# EAGLE board SparkFun_BME280_Breakout (EAGLE 7.1.0)
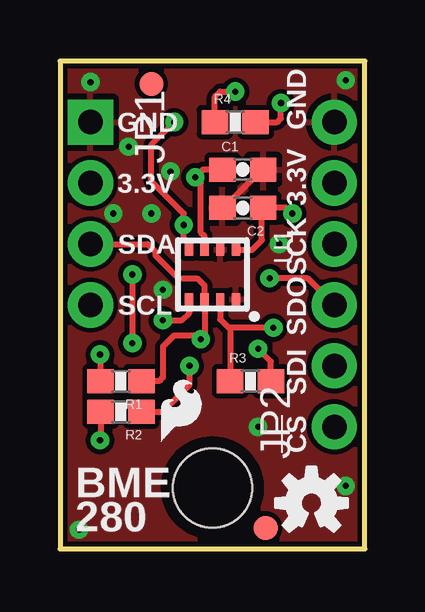
[diagram p0: board, top side]
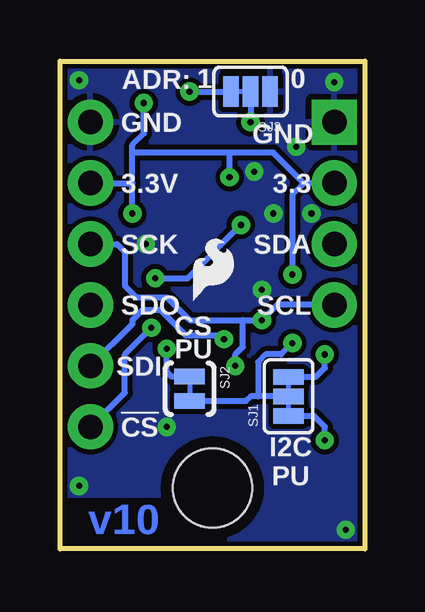
[diagram p1: board, bottom side, seen from below]

Size 12.7 x 20.32 mm. Coordinates in mm from the lower left corner, seen from the top.
Outline: 12.7,20.32 0,20.32 0,0 12.7,0 12.7,20.32
Copper layers (1*16): Top 0.035mm / dielectric 1.5mm / Bottom 0.035mm
Design rules "SparkFun-2-layer": minimum track width 7mil, minimum drill 15mil, track to track 8mil, track to pad 8mil, pad to pad 8mil, via to via 8mil, smd to smd 8mil, copper to edge 8mil, drill to drill 8mil, minimum pad ring 12mil, minimum via ring 10mil, stop-mask expansion 4mil, vias tented up to drill 20mil, thermal gap 10mil

## Footprints (pad centres in the part's own frame; a part is rotated, then mirrored left to right if it is on the bottom)
0603-CAP = smd 1.1 x 1: 1 -0.85,0; 2 0.85,0
FIDUCIAL-1X2 = smd 1 x 1: 1 0,0
1X04_NO_SILK = drill 1.016 pad 1.88 square: 1 0,0 | drill 1.016 pad 1.88: 2 2.54,0; 3 5.08,0; 4 7.62,0
1X06_NO_SILK = drill 1.016 pad 1.88: 1 0,0; 2 2.54,0; 3 5.08,0; 4 7.62,0; 5 10.16,0; 6 12.7,0
0603-RES = smd 1.1 x 1: 1 -0.85,0; 2 0.85,0
PAD-JUMPER-3-3OF3_NC_BY_TRACE_YES_SILK_FULL_BOX = smd 0.635 x 1.27: 1 -0.813,0; 2 0,0; 3 0.813,0
PAD-JUMPER-2-NC_BY_TRACE_YES_SILK = smd 0.635 x 1.27: 1 -0.508,0; 2 0.508,0
PAD-JUMPER-3-2OF3_NC_BY_TRACE_YES_SILK_FULL_BOX = smd 0.635 x 1.27: 1 -0.813,0; 2 0,0; 3 0.813,0
STAND-OFF = hole 3.302: 0,0
BME280_LGA = smd 0.5 x 0.35: P$1 1.025,0.975; P$2 1.025,0.325; P$3 1.025,-0.325; P$4 1.025,-0.975; P$5 -1.025,-0.975; P$6 -1.025,-0.325; P$7 -1.025,0.325; P$8 -1.025,0.975

## Placement (x,y rotation side)
C1  0.1uF  [0603-CAP]  7.62,15.8 0 top
C2  0.1uF  [0603-CAP]  7.62,14.21 180 top
FID1  FIDUCIAL1X2  [FIDUCIAL-1X2]  3.81,19.37 0 top
FID2  FIDUCIAL1X2  [FIDUCIAL-1X2]  8.57,0.87 0 top
FRAME1  FRAME-LETTER  [CREATIVE_COMMONS]  -26.67,-22.86 0 top  (outside the outline)
JP1  [1X04_NO_SILK]  1.27,17.78 270 top
JP2  [1X06_NO_SILK]  11.43,5.08 90 top
LOGO1  SFE_LOGO_FLAME.1_INCH  [SFE_LOGO_FLAME_.1]  7.46,10 0 bottom
LOGO2  SFE_LOGO_FLAME.1_INCH  [SFE_LOGO_FLAME_.1]  3.89,4.13 0 top
LOGO3  OSHW-LOGOS  [OSHW-LOGO-S]  10.48,1.91 0 top
R1  4.7K  [0603-RES]  2.54,6.99 180 top
R2  4.7K  [0603-RES]  2.54,5.71 180 top
R3  4.7K  [0603-RES]  7.94,6.99 0 top
R4  4.7K  [0603-RES]  7.3,17.78 0 top
SJ1  EN I2C PULL  [PAD-JUMPER-3-3OF3_NC_BY_TRACE_YES_SILK_FULL_BOX]  3.17,6.35 90 bottom
SJ2  EN I2C MODE  [PAD-JUMPER-2-NC_BY_TRACE_YES_SILK]  7.3,6.67 270 bottom
SJ3  EN ADR PULLUP  [PAD-JUMPER-3-2OF3_NC_BY_TRACE_YES_SILK_FULL_BOX]  4.76,19.05 180 bottom
STANDOFF4  STAND-OFF  [STAND-OFF]  6.35,2.54 0 top
U1  BME280  [BME280_LGA]  6.35,11.43 270 top

## Library data of the parts
C1 C2 = SparkFun-Capacitors; PROD_ID: CAP-08604
FID1 FID2 FRAME1 LOGO1-LOGO3 = SparkFun-Aesthetics
JP1 = SparkFun-Connectors
JP2 = SparkFun-Connectors; PROD_ID: CONN-08437
R1-R4 = SparkFun-Resistors; PROD_ID: RES-07857
SJ1-SJ3 = SparkFun-Passives
STANDOFF4 = SparkFun-Electromechanical
U1 = BME280ComponentLibrary; PROD_ID: IC-13090

## Nets
3.3V: C1.1 C2.1 JP1.2 JP2.5 R4.2 SJ1.2 SJ2.2 U1.P$6 U1.P$8
!CS: JP2.1 R3.1 U1.P$2
GND: C1.2 C2.2 JP1.1 JP2.6 SJ3.1 U1.P$1 U1.P$7
N$1: R1.2 SJ1.3
N$2: R2.2 SJ1.1
N$3: R3.2 SJ2.1
N$4: R4.1 SJ3.3
SCK/SCL: JP1.4 JP2.4 R2.1 U1.P$4
SDI/SDA: JP1.3 JP2.2 R1.1 U1.P$3
SDO/ADR: JP2.3 SJ3.2 U1.P$5

## Tracks (layer width: path | path; a pad name or v marks a point on that pad's centre or on a via)
3.3V  (via drill 0.25)
  Top 0.254: U1.P$6 6.03,13.03 5.87,13.18 5.87,15.24 v5.64,15.48 5.95,15.8 C1.1 | U1.P$8 8.01,12.46 8.41,12.86 8.41,14.15 C2.1 9.45,14.21 v9.68,13.97 | v3.02,11.43 v3.02,8.57 | R4.2 9.05,17.78 9.21,17.94 v9.21,18.57
  Bottom 0.254: JP1.2 2.54,15.24 | 2.54,15.24 3.81,16.51 5.64,16.51 | 5.64,16.51 9.68,16.51 | v9.68,13.97 9.68,15.24 | 9.68,15.24 9.68,16.51 | 9.68,16.51 9.68,16.83 9.21,17.3 v9.21,18.57 | v5.64,15.48 5.64,16.51 | 2.54,15.24 3.02,14.76 v3.02,11.43 | SJ1.2 4.45,6.35 | 4.45,6.35 4.76,6.35 4.95,6.16 SJ2.2 | v3.02,8.57 3.49,8.1 4.13,8.1 4.45,7.78 4.45,6.35 | JP2.5 9.68,15.24
!CS  (via drill 0.25)
  Top 0.254: v8.89,9.21 7.03,9.21 | U1.P$2 6.67,9.56 7.03,9.21 | 7.03,9.21 7.09,9.15 R3.1
  Bottom 0.254: JP2.1 10,6.51 10,8.1 v8.89,9.21
GND  (via drill 0.25)
  Top 0.254: C2.2 6.83,14.21 8.41,15.8 8.57,15.8
  other vias: 9.13,12.7 2.22,13.97 8.26,5.08 4.29,10.79 11.91,19.53 2.86,16.75 1.27,19.45 3.81,13.97 4.6,15.72 0.79,0.79 11.91,2.62
  pour Top (isolate 0.203): 0,0 12.7,0 12.7,20.32 0,20.32
  pour Bottom (isolate 0.203): 0,20.32 12.7,20.32 12.7,2.26 8.33,2.26 8.33,0 0,0
N$1  (via drill 0.25)
  Top 0.254: v1.67,8.1 1.67,7.01 R1.2
  Bottom 0.254: SJ1.3 2.04,7.16 1.67,7.54 v1.67,8.1
N$2  (via drill 0.25)
  Top 0.254: R2.2 1.69,4.55 v1.67,4.52
  Bottom 0.254: SJ1.1 2.12,5.54 1.67,5.08 v1.67,4.52
N$3  (via drill 0.25)
  Top 0.254: R3.2 8.79,7.8 v8.26,8.33
  Bottom 0.254: SJ2.1 8.05,7.18 8.26,7.38 v8.26,8.33
N$4  (via drill 0.25)
  Top 0.254: R4.1 6.45,18.84 6.67,19.05 v7.3,19.05
  Bottom 0.254: v7.3,19.05 SJ3.3
SCK/SCL  (via drill 0.25)
  Top 0.254: v4.29,9.53 5.08,9.53 5.38,9.82 U1.P$4 | R2.1 4.29,5.71 5.4,6.83 v5.4,7.62
  Bottom 0.254: JP2.4 10.32,12.7 10,12.38 10,10.95 9.53,10.48 8.26,10.48 7.3,9.53 5.08,9.53 | 5.08,9.53 v4.29,9.53 3.65,10.16 JP1.4 | v5.4,7.62 5.4,8.1 5.08,8.41 5.08,9.53
SDI/SDA  (via drill 0.25)
  Top 0.254: JP1.3 3.65,12.7 3.97,12.38 3.97,12.22 4.92,11.27 5.71,11.27 6.03,10.96 U1.P$3 6.03,8.89 v5.87,8.73 5.71,8.89 4.76,8.89 4.29,8.41 4.29,7.14 4.13,6.99 R1.1
  Bottom 0.254: v5.87,8.73 6.03,8.89 7.46,8.89 8.53,9.96 9.25,9.96 9.68,9.53 9.68,9.37 JP2.2
SDO/ADR  (via drill 0.25)
  Top 0.254: U1.P$5 5.38,12.72 5.16,12.94 v5.16,13.49 5.16,13.97 3.81,15.32 3.81,16.83 v4.76,17.78 | JP2.3 10.32,11.27 v8.73,11.27
  Bottom 0.254: v8.73,11.27 7.38,11.27 v5.16,13.49 | SJ3.2 4.92,18.89 4.76,18.73 v4.76,17.78

## Text on the board
Bottom: v10
tPlace: GND | GND | 3.3V | 3.3V | SCK | SDA | SCL | SDO | SDI | !CS | BME / 280
bPlace: 0 | 1 | ADR: | GND | GND | 3.3 | 3.3V | SDA | SCK | SCL | SDO | CS / PU | SDI | !CS | I2C / PU
Measures: Units in inches
tDocu: Marshall Taylor | Note: Top and bottom ground planes must be isolated / no more than 0.008 inch to allow proper grounding.